# EAGLE board LilyPixel Panel v10 (EAGLE 6.4)
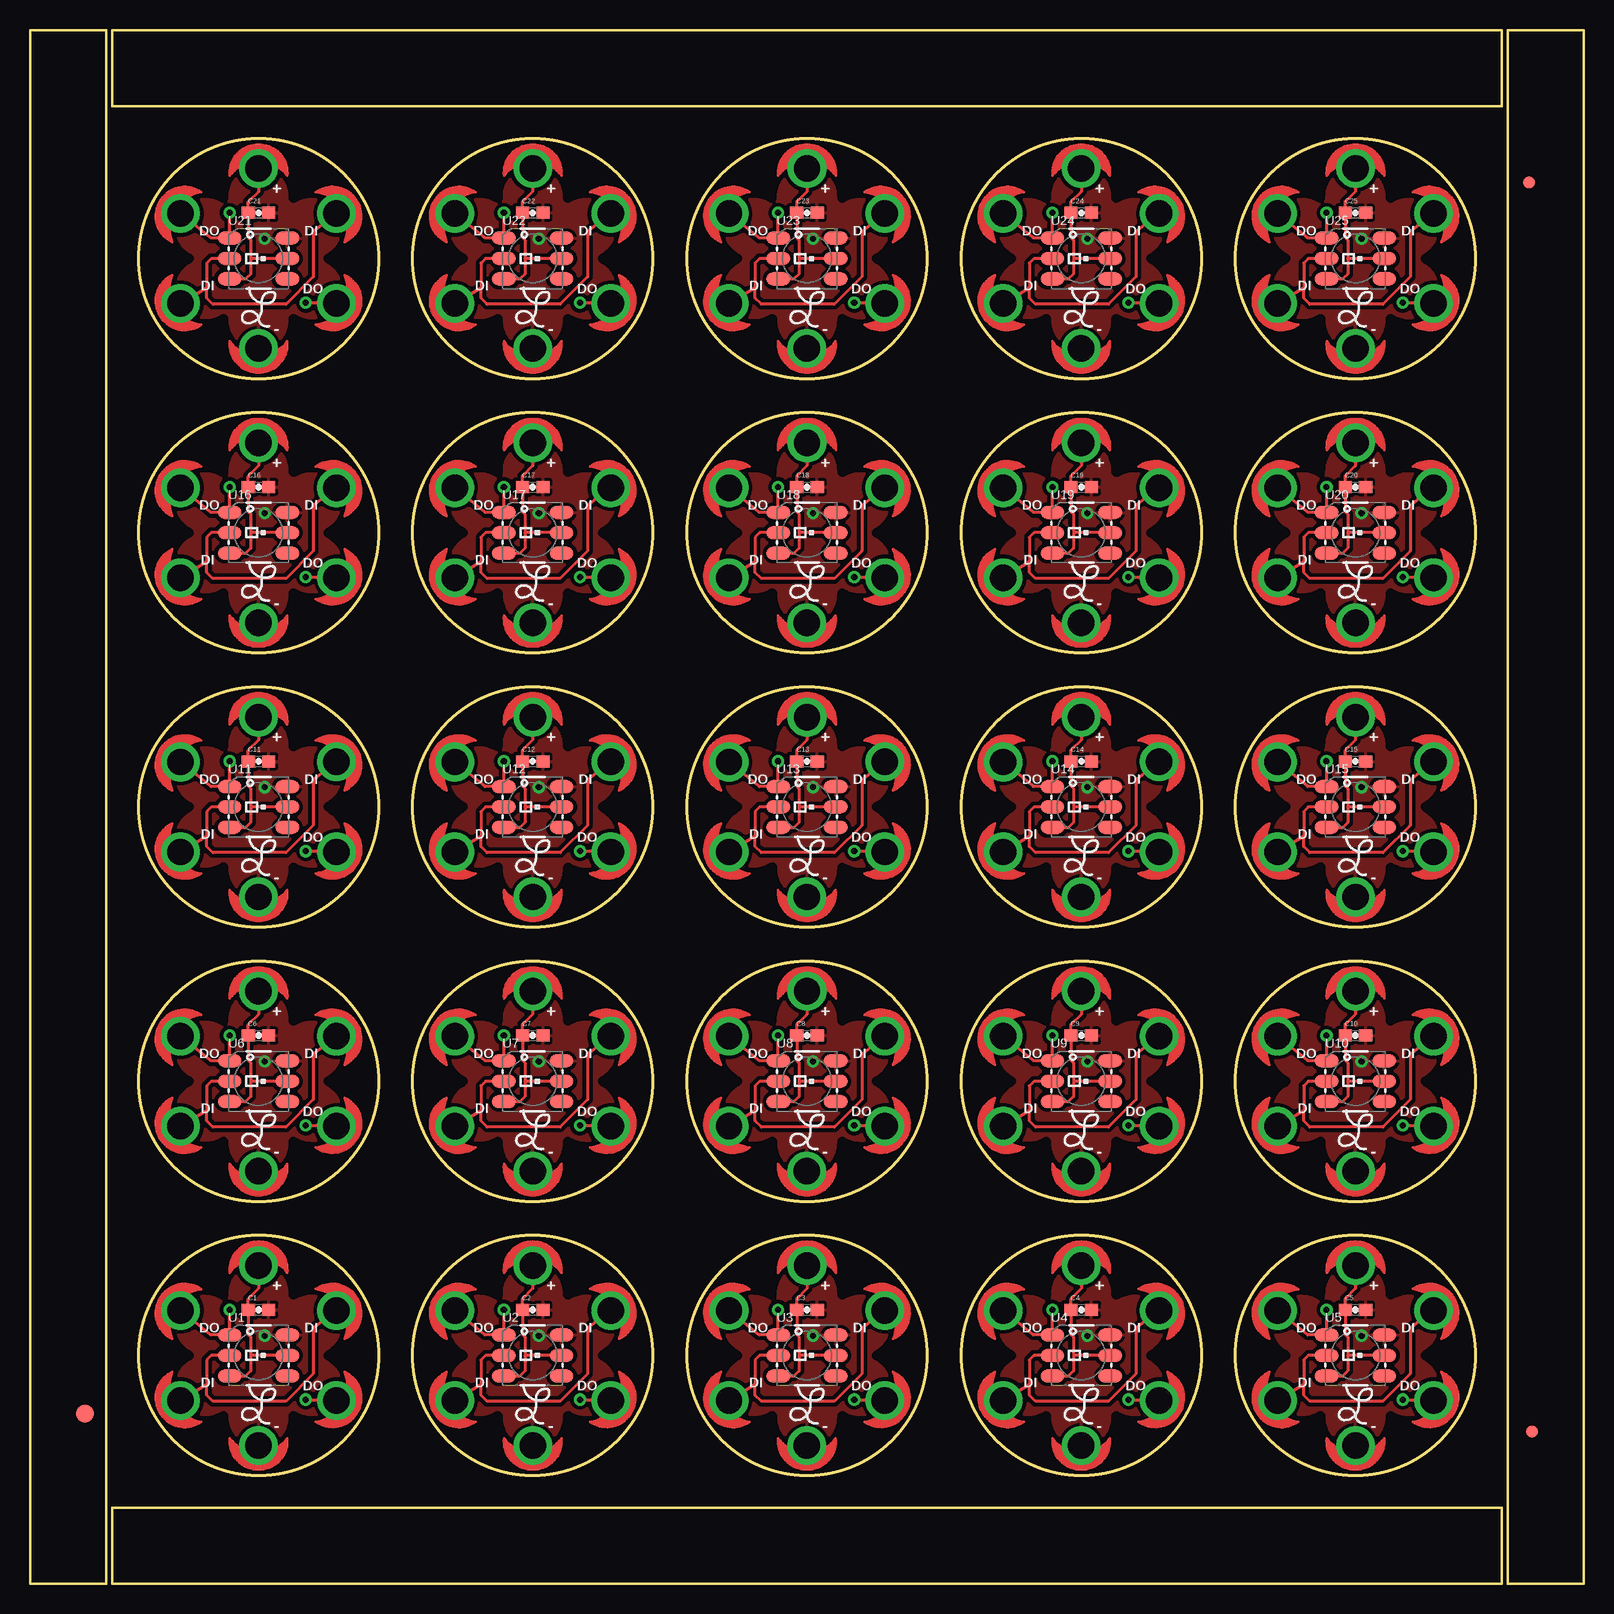
[diagram p0: board, top side]
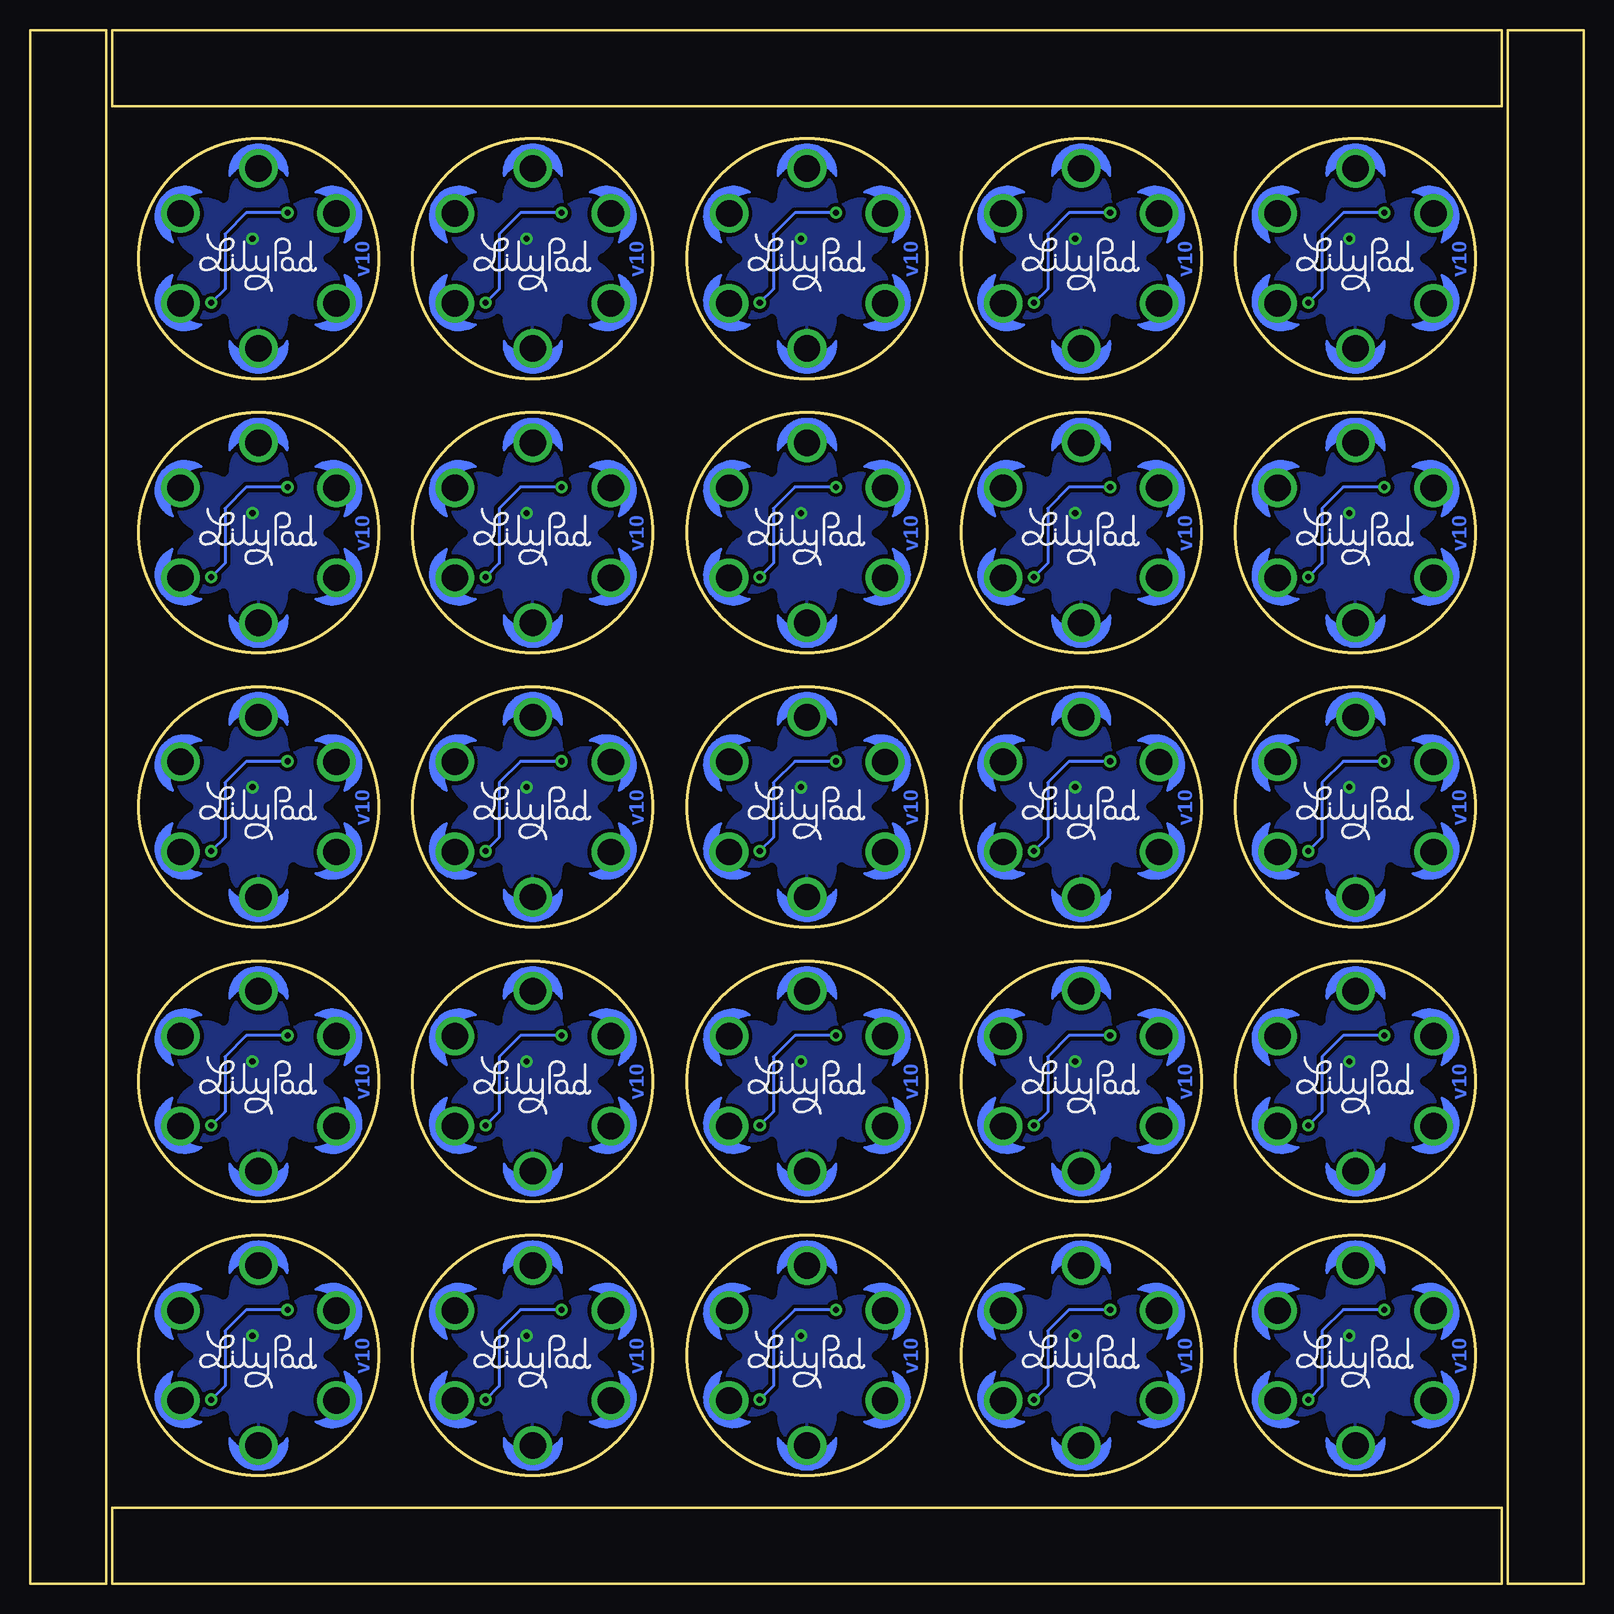
[diagram p1: board, bottom side, seen from below]

Size 129.54 x 129.54 mm. Coordinates in mm from the lower left corner, seen from the top.
Outline: 0,129.54 0,0 6.35,0 6.35,129.54 0,129.54
Outline: 6.86,123.19 122.68,123.19 122.68,129.54 6.86,129.54 6.86,123.19
Outline: 123.19,129.54 123.19,0 129.54,0 129.54,129.54 123.19,129.54
Outline: 122.68,6.35 6.86,6.35 6.86,0 122.68,0 122.68,6.35
Outline: circle at 19.05,19.05 radius 10
Outline: circle at 41.91,19.05 radius 10
Outline: circle at 64.77,19.05 radius 10
Outline: circle at 87.63,19.05 radius 10
Outline: circle at 110.49,19.05 radius 10
Outline: circle at 19.05,41.91 radius 10
Outline: circle at 41.91,41.91 radius 10
Outline: circle at 64.77,41.91 radius 10
Outline: circle at 87.63,41.91 radius 10
Outline: circle at 110.49,41.91 radius 10
Outline: circle at 19.05,64.77 radius 10
Outline: circle at 41.91,64.77 radius 10
Outline: circle at 64.77,64.77 radius 10
Outline: circle at 87.63,64.77 radius 10
Outline: circle at 110.49,64.77 radius 10
Outline: circle at 19.05,87.63 radius 10
Outline: circle at 41.91,87.63 radius 10
Outline: circle at 64.77,87.63 radius 10
Outline: circle at 87.63,87.63 radius 10
Outline: circle at 110.49,87.63 radius 10
Copper layers (1*16): Top 0.035mm / dielectric 1.5mm / Bottom 0.035mm
Design rules "Sparkfun": minimum track width 8mil, minimum drill 20mil, track to track 8mil, track to pad 8mil, pad to pad 8mil, via to via 8mil, smd to smd 8mil, copper to edge 8mil, drill to drill 8mil, minimum pad ring 12mil, minimum via ring 10mil, stop-mask expansion 4mil, vias tented up to drill 20mil, thermal gap 10mil
tRestrict: area 8.9,19.1 to 19.1,29; area 19.1,19.1 to 29.2,29; area 19.1,8.9 to 29.2,19.1; area 8.9,8.9 to 19.1,19.1; area 31.8,19.1 to 41.9,29; area 41.9,19.1 to 52,29; area 41.9,8.9 to 52,19.1; area 31.8,8.9 to 41.9,19.1; area 54.7,19.1 to 64.8,29; area 64.8,19.1 to 74.9,29; area 64.8,8.9 to 74.9,19.1; area 54.7,8.9 to 64.8,19.1; 88 more areas; 150 lines
bRestrict: area 8.9,19.1 to 19.1,29; area 19.1,19.1 to 29.2,29; area 19.1,8.9 to 29.2,19.1; area 8.9,8.9 to 19.1,19.1; area 31.8,19.1 to 41.9,29; area 41.9,19.1 to 52,29; area 41.9,8.9 to 52,19.1; area 31.8,8.9 to 41.9,19.1; area 54.7,19.1 to 64.8,29; area 64.8,19.1 to 74.9,29; area 64.8,8.9 to 74.9,19.1; area 54.7,8.9 to 64.8,19.1; 88 more areas; 150 lines

## Footprints (pad centres in the part's own frame; a part is rotated, then mirrored left to right if it is on the bottom)
0603-CAP = smd 1.1 x 1: 1 -0.85,0; 2 0.85,0
FIDUCIAL-1.5X3 = smd 1.5 x 1.5: 1 0,0
FIDUCIAL-1X2 = smd 1 x 1: 1 0,0
LED-TRICOLOR-5050-IC = smd 2 x 1.1: 1 -2.4,1.7; 2 -2.4,0; 3 -2.4,-1.7; 4 2.4,-1.7; 5 2.4,0; 6 2.4,1.7
PETAL-SMALL-2SIDE = drill 2.2: 1 0,0

## Placement (x,y rotation side)
C1  0.1uF  [0603-CAP]  19.05,22.86 0 top
C2  0.1uF  [0603-CAP]  41.91,22.86 0 top
C3  0.1uF  [0603-CAP]  64.77,22.86 0 top
C4  0.1uF  [0603-CAP]  87.63,22.86 0 top
C5  0.1uF  [0603-CAP]  110.49,22.86 0 top
C6  0.1uF  [0603-CAP]  19.05,45.72 0 top
C7  0.1uF  [0603-CAP]  41.91,45.72 0 top
C8  0.1uF  [0603-CAP]  64.77,45.72 0 top
C9  0.1uF  [0603-CAP]  87.63,45.72 0 top
C10  0.1uF  [0603-CAP]  110.49,45.72 0 top
C11  0.1uF  [0603-CAP]  19.05,68.58 0 top
C12  0.1uF  [0603-CAP]  41.91,68.58 0 top
C13  0.1uF  [0603-CAP]  64.77,68.58 0 top
C14  0.1uF  [0603-CAP]  87.63,68.58 0 top
C15  0.1uF  [0603-CAP]  110.49,68.58 0 top
C16  0.1uF  [0603-CAP]  19.05,91.44 0 top
C17  0.1uF  [0603-CAP]  41.91,91.44 0 top
C18  0.1uF  [0603-CAP]  64.77,91.44 0 top
C19  0.1uF  [0603-CAP]  87.63,91.44 0 top
C20  0.1uF  [0603-CAP]  110.49,91.44 0 top
C21  0.1uF  [0603-CAP]  19.05,114.3 0 top
C22  0.1uF  [0603-CAP]  41.91,114.3 0 top
C23  0.1uF  [0603-CAP]  64.77,114.3 0 top
C24  0.1uF  [0603-CAP]  87.63,114.3 0 top
C25  0.1uF  [0603-CAP]  110.49,114.3 0 top
E$1  [FIDUCIAL-1.5X3]  4.57,14.22 0 top
E$3  [FIDUCIAL-1X2]  124.97,116.84 180 top
E$6  [FIDUCIAL-1X2]  125.22,12.7 0 top
U1  WS2811  [LED-TRICOLOR-5050-IC]  19.05,19.05 0 top
U2  WS2811  [LED-TRICOLOR-5050-IC]  41.91,19.05 0 top
U3  WS2811  [LED-TRICOLOR-5050-IC]  64.77,19.05 0 top
U4  WS2811  [LED-TRICOLOR-5050-IC]  87.63,19.05 0 top
U5  WS2811  [LED-TRICOLOR-5050-IC]  110.49,19.05 0 top
U6  WS2811  [LED-TRICOLOR-5050-IC]  19.05,41.91 0 top
U7  WS2811  [LED-TRICOLOR-5050-IC]  41.91,41.91 0 top
U8  WS2811  [LED-TRICOLOR-5050-IC]  64.77,41.91 0 top
U9  WS2811  [LED-TRICOLOR-5050-IC]  87.63,41.91 0 top
U10  WS2811  [LED-TRICOLOR-5050-IC]  110.49,41.91 0 top
U11  WS2811  [LED-TRICOLOR-5050-IC]  19.05,64.77 0 top
U12  WS2811  [LED-TRICOLOR-5050-IC]  41.91,64.77 0 top
U13  WS2811  [LED-TRICOLOR-5050-IC]  64.77,64.77 0 top
U14  WS2811  [LED-TRICOLOR-5050-IC]  87.63,64.77 0 top
U15  WS2811  [LED-TRICOLOR-5050-IC]  110.49,64.77 0 top
U16  WS2811  [LED-TRICOLOR-5050-IC]  19.05,87.63 0 top
U17  WS2811  [LED-TRICOLOR-5050-IC]  41.91,87.63 0 top
U18  WS2811  [LED-TRICOLOR-5050-IC]  64.77,87.63 0 top
U19  WS2811  [LED-TRICOLOR-5050-IC]  87.63,87.63 0 top
U20  WS2811  [LED-TRICOLOR-5050-IC]  110.49,87.63 0 top
U21  WS2811  [LED-TRICOLOR-5050-IC]  19.05,110.49 0 top
U22  WS2811  [LED-TRICOLOR-5050-IC]  41.91,110.49 0 top
U23  WS2811  [LED-TRICOLOR-5050-IC]  64.77,110.49 0 top
U24  WS2811  [LED-TRICOLOR-5050-IC]  87.63,110.49 0 top
U25  WS2811  [LED-TRICOLOR-5050-IC]  110.49,110.49 0 top
U$1  LOGO-LPLP  [LOGO-LILYPAD]  19.05,19.05 0 bottom
U$2  SEWTAP6  [PETAL-SMALL-2SIDE]  12.55,15.3 300 top
U$3  SEWTAP6  [PETAL-SMALL-2SIDE]  25.55,15.3 60 top
U$4  SEWTAP6  [PETAL-SMALL-2SIDE]  25.54,22.8 120 top
U$5  SEWTAP6  [PETAL-SMALL-2SIDE]  12.55,22.8 240 top
U$6  SEWTAP6  [PETAL-SMALL-2SIDE]  19.05,26.54 180 top
U$7  SEWTAP6  [PETAL-SMALL-2SIDE]  19.05,11.55 0 top
U$8  LOGO-LPL  [LOGO-L]  19.05,14.99 0 top
U$9  SEWTAP6  [PETAL-SMALL-2SIDE]  35.41,15.3 300 top
U$10  SEWTAP6  [PETAL-SMALL-2SIDE]  48.41,15.3 60 top
U$11  SEWTAP6  [PETAL-SMALL-2SIDE]  48.4,22.8 120 top
U$12  SEWTAP6  [PETAL-SMALL-2SIDE]  35.41,22.8 240 top
U$13  SEWTAP6  [PETAL-SMALL-2SIDE]  41.91,26.54 180 top
U$14  SEWTAP6  [PETAL-SMALL-2SIDE]  41.91,11.55 0 top
U$15  LOGO-LPL  [LOGO-L]  41.91,14.99 0 top
U$16  LOGO-LPLP  [LOGO-LILYPAD]  41.91,19.05 0 bottom
U$17  SEWTAP6  [PETAL-SMALL-2SIDE]  58.27,15.3 300 top
U$18  SEWTAP6  [PETAL-SMALL-2SIDE]  71.27,15.3 60 top
U$19  SEWTAP6  [PETAL-SMALL-2SIDE]  71.26,22.8 120 top
U$20  SEWTAP6  [PETAL-SMALL-2SIDE]  58.27,22.8 240 top
U$21  SEWTAP6  [PETAL-SMALL-2SIDE]  64.77,26.54 180 top
U$22  SEWTAP6  [PETAL-SMALL-2SIDE]  64.77,11.55 0 top
U$23  LOGO-LPL  [LOGO-L]  64.77,14.99 0 top
U$24  LOGO-LPLP  [LOGO-LILYPAD]  64.77,19.05 0 bottom
U$25  SEWTAP6  [PETAL-SMALL-2SIDE]  81.13,15.3 300 top
U$26  SEWTAP6  [PETAL-SMALL-2SIDE]  94.13,15.3 60 top
U$27  SEWTAP6  [PETAL-SMALL-2SIDE]  94.12,22.8 120 top
U$28  SEWTAP6  [PETAL-SMALL-2SIDE]  81.13,22.8 240 top
U$29  SEWTAP6  [PETAL-SMALL-2SIDE]  87.63,26.54 180 top
U$30  SEWTAP6  [PETAL-SMALL-2SIDE]  87.63,11.55 0 top
U$31  LOGO-LPL  [LOGO-L]  87.63,14.99 0 top
U$32  LOGO-LPLP  [LOGO-LILYPAD]  87.63,19.05 0 bottom
U$33  SEWTAP6  [PETAL-SMALL-2SIDE]  103.99,15.3 300 top
U$34  SEWTAP6  [PETAL-SMALL-2SIDE]  116.99,15.3 60 top
U$35  SEWTAP6  [PETAL-SMALL-2SIDE]  116.98,22.8 120 top
U$36  SEWTAP6  [PETAL-SMALL-2SIDE]  103.99,22.8 240 top
U$37  SEWTAP6  [PETAL-SMALL-2SIDE]  110.49,26.54 180 top
U$38  SEWTAP6  [PETAL-SMALL-2SIDE]  110.49,11.55 0 top
U$39  LOGO-LPL  [LOGO-L]  110.49,14.99 0 top
U$40  LOGO-LPLP  [LOGO-LILYPAD]  110.49,19.05 0 bottom
U$41  SEWTAP6  [PETAL-SMALL-2SIDE]  12.55,38.16 300 top
U$42  SEWTAP6  [PETAL-SMALL-2SIDE]  25.55,38.16 60 top
U$43  SEWTAP6  [PETAL-SMALL-2SIDE]  25.54,45.66 120 top
U$44  SEWTAP6  [PETAL-SMALL-2SIDE]  12.55,45.66 240 top
U$45  SEWTAP6  [PETAL-SMALL-2SIDE]  19.05,49.4 180 top
U$46  SEWTAP6  [PETAL-SMALL-2SIDE]  19.05,34.41 0 top
U$47  LOGO-LPL  [LOGO-L]  19.05,37.85 0 top
U$48  LOGO-LPLP  [LOGO-LILYPAD]  19.05,41.91 0 bottom
U$49  SEWTAP6  [PETAL-SMALL-2SIDE]  35.41,38.16 300 top
U$50  SEWTAP6  [PETAL-SMALL-2SIDE]  48.41,38.16 60 top
U$51  SEWTAP6  [PETAL-SMALL-2SIDE]  48.4,45.66 120 top
U$52  SEWTAP6  [PETAL-SMALL-2SIDE]  35.41,45.66 240 top
U$53  SEWTAP6  [PETAL-SMALL-2SIDE]  41.91,49.4 180 top
U$54  SEWTAP6  [PETAL-SMALL-2SIDE]  41.91,34.41 0 top
U$55  LOGO-LPL  [LOGO-L]  41.91,37.85 0 top
U$56  LOGO-LPLP  [LOGO-LILYPAD]  41.91,41.91 0 bottom
U$57  SEWTAP6  [PETAL-SMALL-2SIDE]  58.27,38.16 300 top
U$58  SEWTAP6  [PETAL-SMALL-2SIDE]  71.27,38.16 60 top
U$59  SEWTAP6  [PETAL-SMALL-2SIDE]  71.26,45.66 120 top
U$60  SEWTAP6  [PETAL-SMALL-2SIDE]  58.27,45.66 240 top
U$61  SEWTAP6  [PETAL-SMALL-2SIDE]  64.77,49.4 180 top
U$62  SEWTAP6  [PETAL-SMALL-2SIDE]  64.77,34.41 0 top
U$63  LOGO-LPL  [LOGO-L]  64.77,37.85 0 top
U$64  LOGO-LPLP  [LOGO-LILYPAD]  64.77,41.91 0 bottom
U$65  SEWTAP6  [PETAL-SMALL-2SIDE]  81.13,38.16 300 top
U$66  SEWTAP6  [PETAL-SMALL-2SIDE]  94.13,38.16 60 top
U$67  SEWTAP6  [PETAL-SMALL-2SIDE]  94.12,45.66 120 top
U$68  SEWTAP6  [PETAL-SMALL-2SIDE]  81.13,45.66 240 top
U$69  SEWTAP6  [PETAL-SMALL-2SIDE]  87.63,49.4 180 top
U$70  SEWTAP6  [PETAL-SMALL-2SIDE]  87.63,34.41 0 top
U$71  LOGO-LPL  [LOGO-L]  87.63,37.85 0 top
U$72  LOGO-LPLP  [LOGO-LILYPAD]  87.63,41.91 0 bottom
U$73  SEWTAP6  [PETAL-SMALL-2SIDE]  103.99,38.16 300 top
U$74  SEWTAP6  [PETAL-SMALL-2SIDE]  116.99,38.16 60 top
U$75  SEWTAP6  [PETAL-SMALL-2SIDE]  116.98,45.66 120 top
U$76  SEWTAP6  [PETAL-SMALL-2SIDE]  103.99,45.66 240 top
U$77  SEWTAP6  [PETAL-SMALL-2SIDE]  110.49,49.4 180 top
U$78  SEWTAP6  [PETAL-SMALL-2SIDE]  110.49,34.41 0 top
U$79  LOGO-LPL  [LOGO-L]  110.49,37.85 0 top
U$80  LOGO-LPLP  [LOGO-LILYPAD]  110.49,41.91 0 bottom
U$81  SEWTAP6  [PETAL-SMALL-2SIDE]  12.55,61.02 300 top
U$82  SEWTAP6  [PETAL-SMALL-2SIDE]  25.55,61.02 60 top
U$83  SEWTAP6  [PETAL-SMALL-2SIDE]  25.54,68.52 120 top
U$84  SEWTAP6  [PETAL-SMALL-2SIDE]  12.55,68.52 240 top
U$85  SEWTAP6  [PETAL-SMALL-2SIDE]  19.05,72.26 180 top
U$86  SEWTAP6  [PETAL-SMALL-2SIDE]  19.05,57.27 0 top
U$87  LOGO-LPL  [LOGO-L]  19.05,60.71 0 top
U$88  LOGO-LPLP  [LOGO-LILYPAD]  19.05,64.77 0 bottom
U$89  SEWTAP6  [PETAL-SMALL-2SIDE]  35.41,61.02 300 top
U$90  SEWTAP6  [PETAL-SMALL-2SIDE]  48.41,61.02 60 top
U$91  SEWTAP6  [PETAL-SMALL-2SIDE]  48.4,68.52 120 top
U$92  SEWTAP6  [PETAL-SMALL-2SIDE]  35.41,68.52 240 top
U$93  SEWTAP6  [PETAL-SMALL-2SIDE]  41.91,72.26 180 top
U$94  SEWTAP6  [PETAL-SMALL-2SIDE]  41.91,57.27 0 top
U$95  LOGO-LPL  [LOGO-L]  41.91,60.71 0 top
U$96  LOGO-LPLP  [LOGO-LILYPAD]  41.91,64.77 0 bottom
U$97  SEWTAP6  [PETAL-SMALL-2SIDE]  58.27,61.02 300 top
U$98  SEWTAP6  [PETAL-SMALL-2SIDE]  71.27,61.02 60 top
U$99  SEWTAP6  [PETAL-SMALL-2SIDE]  71.26,68.52 120 top
U$100  SEWTAP6  [PETAL-SMALL-2SIDE]  58.27,68.52 240 top
U$101  SEWTAP6  [PETAL-SMALL-2SIDE]  64.77,72.26 180 top
U$102  SEWTAP6  [PETAL-SMALL-2SIDE]  64.77,57.27 0 top
U$103  LOGO-LPL  [LOGO-L]  64.77,60.71 0 top
U$104  LOGO-LPLP  [LOGO-LILYPAD]  64.77,64.77 0 bottom
U$105  SEWTAP6  [PETAL-SMALL-2SIDE]  81.13,61.02 300 top
U$106  SEWTAP6  [PETAL-SMALL-2SIDE]  94.13,61.02 60 top
U$107  SEWTAP6  [PETAL-SMALL-2SIDE]  94.12,68.52 120 top
U$108  SEWTAP6  [PETAL-SMALL-2SIDE]  81.13,68.52 240 top
U$109  SEWTAP6  [PETAL-SMALL-2SIDE]  87.63,72.26 180 top
U$110  SEWTAP6  [PETAL-SMALL-2SIDE]  87.63,57.27 0 top
U$111  LOGO-LPL  [LOGO-L]  87.63,60.71 0 top
U$112  LOGO-LPLP  [LOGO-LILYPAD]  87.63,64.77 0 bottom
U$113  SEWTAP6  [PETAL-SMALL-2SIDE]  103.99,61.02 300 top
U$114  SEWTAP6  [PETAL-SMALL-2SIDE]  116.99,61.02 60 top
U$115  SEWTAP6  [PETAL-SMALL-2SIDE]  116.98,68.52 120 top
U$116  SEWTAP6  [PETAL-SMALL-2SIDE]  103.99,68.52 240 top
U$117  SEWTAP6  [PETAL-SMALL-2SIDE]  110.49,72.26 180 top
U$118  SEWTAP6  [PETAL-SMALL-2SIDE]  110.49,57.27 0 top
U$119  LOGO-LPL  [LOGO-L]  110.49,60.71 0 top
U$120  LOGO-LPLP  [LOGO-LILYPAD]  110.49,64.77 0 bottom
U$121  SEWTAP6  [PETAL-SMALL-2SIDE]  12.55,83.88 300 top
U$122  SEWTAP6  [PETAL-SMALL-2SIDE]  25.55,83.88 60 top
U$123  SEWTAP6  [PETAL-SMALL-2SIDE]  25.54,91.38 120 top
U$124  SEWTAP6  [PETAL-SMALL-2SIDE]  12.55,91.38 240 top
U$125  SEWTAP6  [PETAL-SMALL-2SIDE]  19.05,95.12 180 top
U$126  SEWTAP6  [PETAL-SMALL-2SIDE]  19.05,80.13 0 top
U$127  LOGO-LPL  [LOGO-L]  19.05,83.57 0 top
U$128  LOGO-LPLP  [LOGO-LILYPAD]  19.05,87.63 0 bottom
U$129  SEWTAP6  [PETAL-SMALL-2SIDE]  35.41,83.88 300 top
U$130  SEWTAP6  [PETAL-SMALL-2SIDE]  48.41,83.88 60 top
U$131  SEWTAP6  [PETAL-SMALL-2SIDE]  48.4,91.38 120 top
U$132  SEWTAP6  [PETAL-SMALL-2SIDE]  35.41,91.38 240 top
U$133  SEWTAP6  [PETAL-SMALL-2SIDE]  41.91,95.12 180 top
U$134  SEWTAP6  [PETAL-SMALL-2SIDE]  41.91,80.13 0 top
U$135  LOGO-LPL  [LOGO-L]  41.91,83.57 0 top
U$136  LOGO-LPLP  [LOGO-LILYPAD]  41.91,87.63 0 bottom
U$137  SEWTAP6  [PETAL-SMALL-2SIDE]  58.27,83.88 300 top
U$138  SEWTAP6  [PETAL-SMALL-2SIDE]  71.27,83.88 60 top
U$139  SEWTAP6  [PETAL-SMALL-2SIDE]  71.26,91.38 120 top
U$140  SEWTAP6  [PETAL-SMALL-2SIDE]  58.27,91.38 240 top
U$141  SEWTAP6  [PETAL-SMALL-2SIDE]  64.77,95.12 180 top
U$142  SEWTAP6  [PETAL-SMALL-2SIDE]  64.77,80.13 0 top
U$143  LOGO-LPL  [LOGO-L]  64.77,83.57 0 top
U$144  LOGO-LPLP  [LOGO-LILYPAD]  64.77,87.63 0 bottom
U$145  SEWTAP6  [PETAL-SMALL-2SIDE]  81.13,83.88 300 top
U$146  SEWTAP6  [PETAL-SMALL-2SIDE]  94.13,83.88 60 top
U$147  SEWTAP6  [PETAL-SMALL-2SIDE]  94.12,91.38 120 top
U$148  SEWTAP6  [PETAL-SMALL-2SIDE]  81.13,91.38 240 top
U$149  SEWTAP6  [PETAL-SMALL-2SIDE]  87.63,95.12 180 top
U$150  SEWTAP6  [PETAL-SMALL-2SIDE]  87.63,80.13 0 top
U$151  LOGO-LPL  [LOGO-L]  87.63,83.57 0 top
U$152  LOGO-LPLP  [LOGO-LILYPAD]  87.63,87.63 0 bottom
U$153  SEWTAP6  [PETAL-SMALL-2SIDE]  103.99,83.88 300 top
U$154  SEWTAP6  [PETAL-SMALL-2SIDE]  116.99,83.88 60 top
U$155  SEWTAP6  [PETAL-SMALL-2SIDE]  116.98,91.38 120 top
U$156  SEWTAP6  [PETAL-SMALL-2SIDE]  103.99,91.38 240 top
U$157  SEWTAP6  [PETAL-SMALL-2SIDE]  110.49,95.12 180 top
U$158  SEWTAP6  [PETAL-SMALL-2SIDE]  110.49,80.13 0 top
U$159  LOGO-LPL  [LOGO-L]  110.49,83.57 0 top
U$160  LOGO-LPLP  [LOGO-LILYPAD]  110.49,87.63 0 bottom
U$161  SEWTAP6  [PETAL-SMALL-2SIDE]  12.55,106.74 300 top
U$162  SEWTAP6  [PETAL-SMALL-2SIDE]  25.55,106.74 60 top
U$163  SEWTAP6  [PETAL-SMALL-2SIDE]  25.54,114.24 120 top
U$164  SEWTAP6  [PETAL-SMALL-2SIDE]  12.55,114.24 240 top
U$165  SEWTAP6  [PETAL-SMALL-2SIDE]  19.05,117.98 180 top
U$166  SEWTAP6  [PETAL-SMALL-2SIDE]  19.05,102.99 0 top
U$167  LOGO-LPL  [LOGO-L]  19.05,106.43 0 top
U$168  LOGO-LPLP  [LOGO-LILYPAD]  19.05,110.49 0 bottom
U$169  SEWTAP6  [PETAL-SMALL-2SIDE]  35.41,106.74 300 top
U$170  SEWTAP6  [PETAL-SMALL-2SIDE]  48.41,106.74 60 top
U$171  SEWTAP6  [PETAL-SMALL-2SIDE]  48.4,114.24 120 top
U$172  SEWTAP6  [PETAL-SMALL-2SIDE]  35.41,114.24 240 top
U$173  SEWTAP6  [PETAL-SMALL-2SIDE]  41.91,117.98 180 top
U$174  SEWTAP6  [PETAL-SMALL-2SIDE]  41.91,102.99 0 top
U$175  LOGO-LPL  [LOGO-L]  41.91,106.43 0 top
U$176  LOGO-LPLP  [LOGO-LILYPAD]  41.91,110.49 0 bottom
U$177  SEWTAP6  [PETAL-SMALL-2SIDE]  58.27,106.74 300 top
U$178  SEWTAP6  [PETAL-SMALL-2SIDE]  71.27,106.74 60 top
U$179  SEWTAP6  [PETAL-SMALL-2SIDE]  71.26,114.24 120 top
U$180  SEWTAP6  [PETAL-SMALL-2SIDE]  58.27,114.24 240 top
U$181  SEWTAP6  [PETAL-SMALL-2SIDE]  64.77,117.98 180 top
U$182  SEWTAP6  [PETAL-SMALL-2SIDE]  64.77,102.99 0 top
U$183  LOGO-LPL  [LOGO-L]  64.77,106.43 0 top
U$184  LOGO-LPLP  [LOGO-LILYPAD]  64.77,110.49 0 bottom
U$185  SEWTAP6  [PETAL-SMALL-2SIDE]  81.13,106.74 300 top
U$186  SEWTAP6  [PETAL-SMALL-2SIDE]  94.13,106.74 60 top
U$187  SEWTAP6  [PETAL-SMALL-2SIDE]  94.12,114.24 120 top
U$188  SEWTAP6  [PETAL-SMALL-2SIDE]  81.13,114.24 240 top
U$189  SEWTAP6  [PETAL-SMALL-2SIDE]  87.63,117.98 180 top
U$190  SEWTAP6  [PETAL-SMALL-2SIDE]  87.63,102.99 0 top
U$191  LOGO-LPL  [LOGO-L]  87.63,106.43 0 top
U$192  LOGO-LPLP  [LOGO-LILYPAD]  87.63,110.49 0 bottom
U$193  SEWTAP6  [PETAL-SMALL-2SIDE]  103.99,106.74 300 top
U$194  SEWTAP6  [PETAL-SMALL-2SIDE]  116.99,106.74 60 top
U$195  SEWTAP6  [PETAL-SMALL-2SIDE]  116.98,114.24 120 top
U$196  SEWTAP6  [PETAL-SMALL-2SIDE]  103.99,114.24 240 top
U$197  SEWTAP6  [PETAL-SMALL-2SIDE]  110.49,117.98 180 top
U$198  SEWTAP6  [PETAL-SMALL-2SIDE]  110.49,102.99 0 top
U$199  LOGO-LPL  [LOGO-L]  110.49,106.43 0 top
U$200  LOGO-LPLP  [LOGO-LILYPAD]  110.49,110.49 0 bottom

## Library data of the parts
C1-C25 = SparkFun-Capacitors; PROD_ID: CAP-00810
E$1 E$3 E$6 = SparkFun-Aesthetics
U1-U25 = SparkFun-LED; PROD_ID: DIO-11598
U$1-U$200 = LilyPad-Wearables

## Nets
DI: U1.2 U$2.1 U$4.1
DI1: U2.2 U$9.1 U$11.1
DI2: U3.2 U$17.1 U$19.1
DI3: U4.2 U$25.1 U$27.1
DI4: U5.2 U$33.1 U$35.1
DI5: U6.2 U$41.1 U$43.1
DI6: U7.2 U$49.1 U$51.1
DI7: U8.2 U$57.1 U$59.1
DI8: U9.2 U$65.1 U$67.1
DI9: U10.2 U$73.1 U$75.1
DI10: U11.2 U$81.1 U$83.1
DI11: U12.2 U$89.1 U$91.1
DI12: U13.2 U$97.1 U$99.1
DI13: U14.2 U$105.1 U$107.1
DI14: U15.2 U$113.1 U$115.1
DI15: U16.2 U$121.1 U$123.1
DI16: U17.2 U$129.1 U$131.1
DI17: U18.2 U$137.1 U$139.1
DI18: U19.2 U$145.1 U$147.1
DI19: U20.2 U$153.1 U$155.1
DI20: U21.2 U$161.1 U$163.1
DI21: U22.2 U$169.1 U$171.1
DI22: U23.2 U$177.1 U$179.1
DI23: U24.2 U$185.1 U$187.1
DI24: U25.2 U$193.1 U$195.1
DO: U1.1 U$3.1 U$5.1
DO1: U2.1 U$10.1 U$12.1
DO2: U3.1 U$18.1 U$20.1
DO3: U4.1 U$26.1 U$28.1
DO4: U5.1 U$34.1 U$36.1
DO5: U6.1 U$42.1 U$44.1
DO6: U7.1 U$50.1 U$52.1
DO7: U8.1 U$58.1 U$60.1
DO8: U9.1 U$66.1 U$68.1
DO9: U10.1 U$74.1 U$76.1
DO10: U11.1 U$82.1 U$84.1
DO11: U12.1 U$90.1 U$92.1
DO12: U13.1 U$98.1 U$100.1
DO13: U14.1 U$106.1 U$108.1
DO14: U15.1 U$114.1 U$116.1
DO15: U16.1 U$122.1 U$124.1
DO16: U17.1 U$130.1 U$132.1
DO17: U18.1 U$138.1 U$140.1
DO18: U19.1 U$146.1 U$148.1
DO19: U20.1 U$154.1 U$156.1
DO20: U21.1 U$162.1 U$164.1
DO21: U22.1 U$170.1 U$172.1
DO22: U23.1 U$178.1 U$180.1
DO23: U24.1 U$186.1 U$188.1
DO24: U25.1 U$194.1 U$196.1
GND: C1.2 U1.6 U$7.1
GND1: C2.2 U2.6 U$14.1
GND2: C3.2 U3.6 U$22.1
GND3: C4.2 U4.6 U$30.1
GND4: C5.2 U5.6 U$38.1
GND5: C6.2 U6.6 U$46.1
GND6: C7.2 U7.6 U$54.1
GND7: C8.2 U8.6 U$62.1
GND8: C9.2 U9.6 U$70.1
GND9: C10.2 U10.6 U$78.1
GND10: C11.2 U11.6 U$86.1
GND11: C12.2 U12.6 U$94.1
GND12: C13.2 U13.6 U$102.1
GND13: C14.2 U14.6 U$110.1
GND14: C15.2 U15.6 U$118.1
GND15: C16.2 U16.6 U$126.1
GND16: C17.2 U17.6 U$134.1
GND17: C18.2 U18.6 U$142.1
GND18: C19.2 U19.6 U$150.1
GND19: C20.2 U20.6 U$158.1
GND20: C21.2 U21.6 U$166.1
GND21: C22.2 U22.6 U$174.1
GND22: C23.2 U23.6 U$182.1
GND23: C24.2 U24.6 U$190.1
GND24: C25.2 U25.6 U$198.1
VCC: C1.1 U1.3 U1.5 U$6.1
VCC1: C2.1 U2.3 U2.5 U$13.1
VCC2: C3.1 U3.3 U3.5 U$21.1
VCC3: C4.1 U4.3 U4.5 U$29.1
VCC4: C5.1 U5.3 U5.5 U$37.1
VCC5: C6.1 U6.3 U6.5 U$45.1
VCC6: C7.1 U7.3 U7.5 U$53.1
VCC7: C8.1 U8.3 U8.5 U$61.1
VCC8: C9.1 U9.3 U9.5 U$69.1
VCC9: C10.1 U10.3 U10.5 U$77.1
VCC10: C11.1 U11.3 U11.5 U$85.1
VCC11: C12.1 U12.3 U12.5 U$93.1
VCC12: C13.1 U13.3 U13.5 U$101.1
VCC13: C14.1 U14.3 U14.5 U$109.1
VCC14: C15.1 U15.3 U15.5 U$117.1
VCC15: C16.1 U16.3 U16.5 U$125.1
VCC16: C17.1 U17.3 U17.5 U$133.1
VCC17: C18.1 U18.3 U18.5 U$141.1
VCC18: C19.1 U19.3 U19.5 U$149.1
VCC19: C20.1 U20.3 U20.5 U$157.1
VCC20: C21.1 U21.3 U21.5 U$165.1
VCC21: C22.1 U22.3 U22.5 U$173.1
VCC22: C23.1 U23.3 U23.5 U$181.1
VCC23: C24.1 U24.3 U24.5 U$189.1
VCC24: C25.1 U25.3 U25.5 U$197.1

## Tracks (layer width: path | path; a pad name or v marks a point on that pad's centre or on a via)
DI
  Top 0.254: U$2.1 14.73,16.64 | U1.2 15.11,19.05 14.73,18.67 14.73,16.64 | U$4.1 23.62,21.34 23.62,17.53 21.34,15.24 15.24,15.24 14.73,15.75 14.73,16.64
DI1
  Top 0.254: U$9.1 37.59,16.64 | U2.2 37.97,19.05 37.59,18.67 37.59,16.64 | U$11.1 46.48,21.34 46.48,17.53 44.2,15.24 38.1,15.24 37.59,15.75 37.59,16.64
DI2
  Top 0.254: U$17.1 60.45,16.64 | U3.2 60.83,19.05 60.45,18.67 60.45,16.64 | U$19.1 69.34,21.34 69.34,17.53 67.06,15.24 60.96,15.24 60.45,15.75 60.45,16.64
DI3
  Top 0.254: U$25.1 83.31,16.64 | U4.2 83.69,19.05 83.31,18.67 83.31,16.64 | U$27.1 92.2,21.34 92.2,17.53 89.92,15.24 83.82,15.24 83.31,15.75 83.31,16.64
DI4
  Top 0.254: U$33.1 106.17,16.64 | U5.2 106.55,19.05 106.17,18.67 106.17,16.64 | U$35.1 115.06,21.34 115.06,17.53 112.78,15.24 106.68,15.24 106.17,15.75 106.17,16.64
DI5
  Top 0.254: U$41.1 14.73,39.5 | U6.2 15.11,41.91 14.73,41.53 14.73,39.5 | U$43.1 23.62,44.2 23.62,40.39 21.34,38.1 15.24,38.1 14.73,38.61 14.73,39.5
DI6
  Top 0.254: U$49.1 37.59,39.5 | U7.2 37.97,41.91 37.59,41.53 37.59,39.5 | U$51.1 46.48,44.2 46.48,40.39 44.2,38.1 38.1,38.1 37.59,38.61 37.59,39.5
DI7
  Top 0.254: U$57.1 60.45,39.5 | U8.2 60.83,41.91 60.45,41.53 60.45,39.5 | U$59.1 69.34,44.2 69.34,40.39 67.06,38.1 60.96,38.1 60.45,38.61 60.45,39.5
DI8
  Top 0.254: U$65.1 83.31,39.5 | U9.2 83.69,41.91 83.31,41.53 83.31,39.5 | U$67.1 92.2,44.2 92.2,40.39 89.92,38.1 83.82,38.1 83.31,38.61 83.31,39.5
DI9
  Top 0.254: U$73.1 106.17,39.5 | U10.2 106.55,41.91 106.17,41.53 106.17,39.5 | U$75.1 115.06,44.2 115.06,40.39 112.78,38.1 106.68,38.1 106.17,38.61 106.17,39.5
DI10
  Top 0.254: U$81.1 14.73,62.36 | U11.2 15.11,64.77 14.73,64.39 14.73,62.36 | U$83.1 23.62,67.06 23.62,63.25 21.34,60.96 15.24,60.96 14.73,61.47 14.73,62.36
DI11
  Top 0.254: U$89.1 37.59,62.36 | U12.2 37.97,64.77 37.59,64.39 37.59,62.36 | U$91.1 46.48,67.06 46.48,63.25 44.2,60.96 38.1,60.96 37.59,61.47 37.59,62.36
DI12
  Top 0.254: U$97.1 60.45,62.36 | U13.2 60.83,64.77 60.45,64.39 60.45,62.36 | U$99.1 69.34,67.06 69.34,63.25 67.06,60.96 60.96,60.96 60.45,61.47 60.45,62.36
DI13
  Top 0.254: U$105.1 83.31,62.36 | U14.2 83.69,64.77 83.31,64.39 83.31,62.36 | U$107.1 92.2,67.06 92.2,63.25 89.92,60.96 83.82,60.96 83.31,61.47 83.31,62.36
DI14
  Top 0.254: U$113.1 106.17,62.36 | U15.2 106.55,64.77 106.17,64.39 106.17,62.36 | U$115.1 115.06,67.06 115.06,63.25 112.78,60.96 106.68,60.96 106.17,61.47 106.17,62.36
DI15
  Top 0.254: U$121.1 14.73,85.22 | U16.2 15.11,87.63 14.73,87.25 14.73,85.22 | U$123.1 23.62,89.92 23.62,86.11 21.34,83.82 15.24,83.82 14.73,84.33 14.73,85.22
DI16
  Top 0.254: U$129.1 37.59,85.22 | U17.2 37.97,87.63 37.59,87.25 37.59,85.22 | U$131.1 46.48,89.92 46.48,86.11 44.2,83.82 38.1,83.82 37.59,84.33 37.59,85.22
DI17
  Top 0.254: U$137.1 60.45,85.22 | U18.2 60.83,87.63 60.45,87.25 60.45,85.22 | U$139.1 69.34,89.92 69.34,86.11 67.06,83.82 60.96,83.82 60.45,84.33 60.45,85.22
DI18
  Top 0.254: U$145.1 83.31,85.22 | U19.2 83.69,87.63 83.31,87.25 83.31,85.22 | U$147.1 92.2,89.92 92.2,86.11 89.92,83.82 83.82,83.82 83.31,84.33 83.31,85.22
DI19
  Top 0.254: U$153.1 106.17,85.22 | U20.2 106.55,87.63 106.17,87.25 106.17,85.22 | U$155.1 115.06,89.92 115.06,86.11 112.78,83.82 106.68,83.82 106.17,84.33 106.17,85.22
DI20
  Top 0.254: U$161.1 14.73,108.08 | U21.2 15.11,110.49 14.73,110.11 14.73,108.08 | U$163.1 23.62,112.78 23.62,108.97 21.34,106.68 15.24,106.68 14.73,107.19 14.73,108.08
DI21
  Top 0.254: U$169.1 37.59,108.08 | U22.2 37.97,110.49 37.59,110.11 37.59,108.08 | U$171.1 46.48,112.78 46.48,108.97 44.2,106.68 38.1,106.68 37.59,107.19 37.59,108.08
DI22
  Top 0.254: U$177.1 60.45,108.08 | U23.2 60.83,110.49 60.45,110.11 60.45,108.08 | U$179.1 69.34,112.78 69.34,108.97 67.06,106.68 60.96,106.68 60.45,107.19 60.45,108.08
DI23
  Top 0.254: U$185.1 83.31,108.08 | U24.2 83.69,110.49 83.31,110.11 83.31,108.08 | U$187.1 92.2,112.78 92.2,108.97 89.92,106.68 83.82,106.68 83.31,107.19 83.31,108.08
DI24
  Top 0.254: U$193.1 106.17,108.08 | U25.2 106.55,110.49 106.17,110.11 106.17,108.08 | U$195.1 115.06,112.78 115.06,108.97 112.78,106.68 106.68,106.68 106.17,107.19 106.17,108.08
DO  (via drill 0.51)
  Top 0.254: U$5.1 14.99,20.83 15.06,20.75 U1.1 16.65,22.85 v16.64,22.86 | v22.99,15.37 25.48,15.37 U$3.1
  Bottom 0.254: v16.64,22.86 20.07,22.86 21.84,21.08 21.84,16.51 v22.99,15.37
DO1  (via drill 0.51)
  Top 0.254: U$12.1 37.85,20.83 37.92,20.75 U2.1 39.51,22.85 v39.5,22.86 | v45.85,15.37 48.34,15.37 U$10.1
  Bottom 0.254: v39.5,22.86 42.93,22.86 44.7,21.08 44.7,16.51 v45.85,15.37
DO2  (via drill 0.51)
  Top 0.254: U$20.1 60.71,20.83 60.78,20.75 U3.1 62.37,22.85 v62.36,22.86 | v68.71,15.37 71.2,15.37 U$18.1
  Bottom 0.254: v62.36,22.86 65.79,22.86 67.56,21.08 67.56,16.51 v68.71,15.37
DO3  (via drill 0.51)
  Top 0.254: U$28.1 83.57,20.83 83.64,20.75 U4.1 85.23,22.85 v85.22,22.86 | v91.57,15.37 94.06,15.37 U$26.1
  Bottom 0.254: v85.22,22.86 88.65,22.86 90.42,21.08 90.42,16.51 v91.57,15.37
DO4  (via drill 0.51)
  Top 0.254: U$36.1 106.43,20.83 106.5,20.75 U5.1 108.09,22.85 v108.08,22.86 | v114.43,15.37 116.92,15.37 U$34.1
  Bottom 0.254: v108.08,22.86 111.51,22.86 113.28,21.08 113.28,16.51 v114.43,15.37
DO5  (via drill 0.51)
  Top 0.254: U$44.1 14.99,43.69 15.06,43.61 U6.1 16.65,45.71 v16.64,45.72 | v22.99,38.23 25.48,38.23 U$42.1
  Bottom 0.254: v16.64,45.72 20.07,45.72 21.84,43.94 21.84,39.37 v22.99,38.23
DO6  (via drill 0.51)
  Top 0.254: U$52.1 37.85,43.69 37.92,43.61 U7.1 39.51,45.71 v39.5,45.72 | v45.85,38.23 48.34,38.23 U$50.1
  Bottom 0.254: v39.5,45.72 42.93,45.72 44.7,43.94 44.7,39.37 v45.85,38.23
DO7  (via drill 0.51)
  Top 0.254: U$60.1 60.71,43.69 60.78,43.61 U8.1 62.37,45.71 v62.36,45.72 | v68.71,38.23 71.2,38.23 U$58.1
  Bottom 0.254: v62.36,45.72 65.79,45.72 67.56,43.94 67.56,39.37 v68.71,38.23
DO8  (via drill 0.51)
  Top 0.254: U$68.1 83.57,43.69 83.64,43.61 U9.1 85.23,45.71 v85.22,45.72 | v91.57,38.23 94.06,38.23 U$66.1
  Bottom 0.254: v85.22,45.72 88.65,45.72 90.42,43.94 90.42,39.37 v91.57,38.23
DO9  (via drill 0.51)
  Top 0.254: U$76.1 106.43,43.69 106.5,43.61 U10.1 108.09,45.71 v108.08,45.72 | v114.43,38.23 116.92,38.23 U$74.1
  Bottom 0.254: v108.08,45.72 111.51,45.72 113.28,43.94 113.28,39.37 v114.43,38.23
DO10  (via drill 0.51)
  Top 0.254: U$84.1 14.99,66.55 15.06,66.47 U11.1 16.65,68.57 v16.64,68.58 | v22.99,61.09 25.48,61.09 U$82.1
  Bottom 0.254: v16.64,68.58 20.07,68.58 21.84,66.8 21.84,62.23 v22.99,61.09
DO11  (via drill 0.51)
  Top 0.254: U$92.1 37.85,66.55 37.92,66.47 U12.1 39.51,68.57 v39.5,68.58 | v45.85,61.09 48.34,61.09 U$90.1
  Bottom 0.254: v39.5,68.58 42.93,68.58 44.7,66.8 44.7,62.23 v45.85,61.09
DO12  (via drill 0.51)
  Top 0.254: U$100.1 60.71,66.55 60.78,66.47 U13.1 62.37,68.57 v62.36,68.58 | v68.71,61.09 71.2,61.09 U$98.1
  Bottom 0.254: v62.36,68.58 65.79,68.58 67.56,66.8 67.56,62.23 v68.71,61.09
DO13  (via drill 0.51)
  Top 0.254: U$108.1 83.57,66.55 83.64,66.47 U14.1 85.23,68.57 v85.22,68.58 | v91.57,61.09 94.06,61.09 U$106.1
  Bottom 0.254: v85.22,68.58 88.65,68.58 90.42,66.8 90.42,62.23 v91.57,61.09
DO14  (via drill 0.51)
  Top 0.254: U$116.1 106.43,66.55 106.5,66.47 U15.1 108.09,68.57 v108.08,68.58 | v114.43,61.09 116.92,61.09 U$114.1
  Bottom 0.254: v108.08,68.58 111.51,68.58 113.28,66.8 113.28,62.23 v114.43,61.09
DO15  (via drill 0.51)
  Top 0.254: U$124.1 14.99,89.41 15.06,89.33 U16.1 16.65,91.43 v16.64,91.44 | v22.99,83.95 25.48,83.95 U$122.1
  Bottom 0.254: v16.64,91.44 20.07,91.44 21.84,89.66 21.84,85.09 v22.99,83.95
DO16  (via drill 0.51)
  Top 0.254: U$132.1 37.85,89.41 37.92,89.33 U17.1 39.51,91.43 v39.5,91.44 | v45.85,83.95 48.34,83.95 U$130.1
  Bottom 0.254: v39.5,91.44 42.93,91.44 44.7,89.66 44.7,85.09 v45.85,83.95
DO17  (via drill 0.51)
  Top 0.254: U$140.1 60.71,89.41 60.78,89.33 U18.1 62.37,91.43 v62.36,91.44 | v68.71,83.95 71.2,83.95 U$138.1
  Bottom 0.254: v62.36,91.44 65.79,91.44 67.56,89.66 67.56,85.09 v68.71,83.95
DO18  (via drill 0.51)
  Top 0.254: U$148.1 83.57,89.41 83.64,89.33 U19.1 85.23,91.43 v85.22,91.44 | v91.57,83.95 94.06,83.95 U$146.1
  Bottom 0.254: v85.22,91.44 88.65,91.44 90.42,89.66 90.42,85.09 v91.57,83.95
DO19  (via drill 0.51)
  Top 0.254: U$156.1 106.43,89.41 106.5,89.33 U20.1 108.09,91.43 v108.08,91.44 | v114.43,83.95 116.92,83.95 U$154.1
  Bottom 0.254: v108.08,91.44 111.51,91.44 113.28,89.66 113.28,85.09 v114.43,83.95
DO20  (via drill 0.51)
  Top 0.254: U$164.1 14.99,112.27 15.06,112.19 U21.1 16.65,114.29 v16.64,114.3 | v22.99,106.81 25.48,106.81 U$162.1
  Bottom 0.254: v16.64,114.3 20.07,114.3 21.84,112.52 21.84,107.95 v22.99,106.81
DO21  (via drill 0.51)
  Top 0.254: U$172.1 37.85,112.27 37.92,112.19 U22.1 39.51,114.29 v39.5,114.3 | v45.85,106.81 48.34,106.81 U$170.1
  Bottom 0.254: v39.5,114.3 42.93,114.3 44.7,112.52 44.7,107.95 v45.85,106.81
DO22  (via drill 0.51)
  Top 0.254: U$180.1 60.71,112.27 60.78,112.19 U23.1 62.37,114.29 v62.36,114.3 | v68.71,106.81 71.2,106.81 U$178.1
  Bottom 0.254: v62.36,114.3 65.79,114.3 67.56,112.52 67.56,107.95 v68.71,106.81
DO23  (via drill 0.51)
  Top 0.254: U$188.1 83.57,112.27 83.64,112.19 U24.1 85.23,114.29 v85.22,114.3 | v91.57,106.81 94.06,106.81 U$186.1
  Bottom 0.254: v85.22,114.3 88.65,114.3 90.42,112.52 90.42,107.95 v91.57,106.81
DO24  (via drill 0.51)
  Top 0.254: U$196.1 106.43,112.27 106.5,112.19 U25.1 108.09,114.29 v108.08,114.3 | v114.43,106.81 116.92,106.81 U$194.1
  Bottom 0.254: v108.08,114.3 111.51,114.3 113.28,112.52 113.28,107.95 v114.43,106.81
GND  (via drill 0.51)
  other vias: 19.56,20.7
  pour Bottom (isolate 0.305): 10.16,27.94 10.16,10.16 27.94,10.16 27.94,27.94
  pour Top (isolate 0.305): 10.16,27.94 10.16,10.16 27.94,10.16 27.94,27.94
GND1  (via drill 0.51)
  other vias: 42.42,20.7
  pour Bottom (isolate 0.305): 33.02,27.94 33.02,10.16 50.8,10.16 50.8,27.94
  pour Top (isolate 0.305): 33.02,27.94 33.02,10.16 50.8,10.16 50.8,27.94
GND2  (via drill 0.51)
  other vias: 65.28,20.7
  pour Bottom (isolate 0.305): 55.88,27.94 55.88,10.16 73.66,10.16 73.66,27.94
  pour Top (isolate 0.305): 55.88,27.94 55.88,10.16 73.66,10.16 73.66,27.94
GND3  (via drill 0.51)
  other vias: 88.14,20.7
  pour Bottom (isolate 0.305): 78.74,27.94 78.74,10.16 96.52,10.16 96.52,27.94
  pour Top (isolate 0.305): 78.74,27.94 78.74,10.16 96.52,10.16 96.52,27.94
GND4  (via drill 0.51)
  other vias: 111,20.7
  pour Bottom (isolate 0.305): 101.6,27.94 101.6,10.16 119.38,10.16 119.38,27.94
  pour Top (isolate 0.305): 101.6,27.94 101.6,10.16 119.38,10.16 119.38,27.94
GND5  (via drill 0.51)
  other vias: 19.56,43.56
  pour Bottom (isolate 0.305): 10.16,50.8 10.16,33.02 27.94,33.02 27.94,50.8
  pour Top (isolate 0.305): 10.16,50.8 10.16,33.02 27.94,33.02 27.94,50.8
GND6  (via drill 0.51)
  other vias: 42.42,43.56
  pour Bottom (isolate 0.305): 33.02,50.8 33.02,33.02 50.8,33.02 50.8,50.8
  pour Top (isolate 0.305): 33.02,50.8 33.02,33.02 50.8,33.02 50.8,50.8
GND7  (via drill 0.51)
  other vias: 65.28,43.56
  pour Bottom (isolate 0.305): 55.88,50.8 55.88,33.02 73.66,33.02 73.66,50.8
  pour Top (isolate 0.305): 55.88,50.8 55.88,33.02 73.66,33.02 73.66,50.8
GND8  (via drill 0.51)
  other vias: 88.14,43.56
  pour Bottom (isolate 0.305): 78.74,50.8 78.74,33.02 96.52,33.02 96.52,50.8
  pour Top (isolate 0.305): 78.74,50.8 78.74,33.02 96.52,33.02 96.52,50.8
GND9  (via drill 0.51)
  other vias: 111,43.56
  pour Bottom (isolate 0.305): 101.6,50.8 101.6,33.02 119.38,33.02 119.38,50.8
  pour Top (isolate 0.305): 101.6,50.8 101.6,33.02 119.38,33.02 119.38,50.8
GND10  (via drill 0.51)
  other vias: 19.56,66.42
  pour Bottom (isolate 0.305): 10.16,73.66 10.16,55.88 27.94,55.88 27.94,73.66
  pour Top (isolate 0.305): 10.16,73.66 10.16,55.88 27.94,55.88 27.94,73.66
GND11  (via drill 0.51)
  other vias: 42.42,66.42
  pour Bottom (isolate 0.305): 33.02,73.66 33.02,55.88 50.8,55.88 50.8,73.66
  pour Top (isolate 0.305): 33.02,73.66 33.02,55.88 50.8,55.88 50.8,73.66
GND12  (via drill 0.51)
  other vias: 65.28,66.42
  pour Bottom (isolate 0.305): 55.88,73.66 55.88,55.88 73.66,55.88 73.66,73.66
  pour Top (isolate 0.305): 55.88,73.66 55.88,55.88 73.66,55.88 73.66,73.66
GND13  (via drill 0.51)
  other vias: 88.14,66.42
  pour Bottom (isolate 0.305): 78.74,73.66 78.74,55.88 96.52,55.88 96.52,73.66
  pour Top (isolate 0.305): 78.74,73.66 78.74,55.88 96.52,55.88 96.52,73.66
GND14  (via drill 0.51)
  other vias: 111,66.42
  pour Bottom (isolate 0.305): 101.6,73.66 101.6,55.88 119.38,55.88 119.38,73.66
  pour Top (isolate 0.305): 101.6,73.66 101.6,55.88 119.38,55.88 119.38,73.66
GND15  (via drill 0.51)
  other vias: 19.56,89.28
  pour Bottom (isolate 0.305): 10.16,96.52 10.16,78.74 27.94,78.74 27.94,96.52
  pour Top (isolate 0.305): 10.16,96.52 10.16,78.74 27.94,78.74 27.94,96.52
GND16  (via drill 0.51)
  other vias: 42.42,89.28
  pour Bottom (isolate 0.305): 33.02,96.52 33.02,78.74 50.8,78.74 50.8,96.52
  pour Top (isolate 0.305): 33.02,96.52 33.02,78.74 50.8,78.74 50.8,96.52
GND17  (via drill 0.51)
  other vias: 65.28,89.28
  pour Bottom (isolate 0.305): 55.88,96.52 55.88,78.74 73.66,78.74 73.66,96.52
  pour Top (isolate 0.305): 55.88,96.52 55.88,78.74 73.66,78.74 73.66,96.52
GND18  (via drill 0.51)
  other vias: 88.14,89.28
  pour Bottom (isolate 0.305): 78.74,96.52 78.74,78.74 96.52,78.74 96.52,96.52
  pour Top (isolate 0.305): 78.74,96.52 78.74,78.74 96.52,78.74 96.52,96.52
GND19  (via drill 0.51)
  other vias: 111,89.28
  pour Bottom (isolate 0.305): 101.6,96.52 101.6,78.74 119.38,78.74 119.38,96.52
  pour Top (isolate 0.305): 101.6,96.52 101.6,78.74 119.38,78.74 119.38,96.52
GND20  (via drill 0.51)
  other vias: 19.56,112.14
  pour Bottom (isolate 0.305): 10.16,119.38 10.16,101.6 27.94,101.6 27.94,119.38
  pour Top (isolate 0.305): 10.16,119.38 10.16,101.6 27.94,101.6 27.94,119.38
GND21  (via drill 0.51)
  other vias: 42.42,112.14
  pour Bottom (isolate 0.305): 33.02,119.38 33.02,101.6 50.8,101.6 50.8,119.38
  pour Top (isolate 0.305): 33.02,119.38 33.02,101.6 50.8,101.6 50.8,119.38
GND22  (via drill 0.51)
  other vias: 65.28,112.14
  pour Bottom (isolate 0.305): 55.88,119.38 55.88,101.6 73.66,101.6 73.66,119.38
  pour Top (isolate 0.305): 55.88,119.38 55.88,101.6 73.66,101.6 73.66,119.38
GND23  (via drill 0.51)
  other vias: 88.14,112.14
  pour Bottom (isolate 0.305): 78.74,119.38 78.74,101.6 96.52,101.6 96.52,119.38
  pour Top (isolate 0.305): 78.74,119.38 78.74,101.6 96.52,101.6 96.52,119.38
GND24  (via drill 0.51)
  other vias: 111,112.14
  pour Bottom (isolate 0.305): 101.6,119.38 101.6,101.6 119.38,101.6 119.38,119.38
  pour Top (isolate 0.305): 101.6,119.38 101.6,101.6 119.38,101.6 119.38,119.38
VCC
  Top 0.254: U$6.1 19.05,24.64 18.2,23.79 C1.1 18.2,20.79 18.4,20.59 18.4,19.05 | 18.4,19.05 18.4,17.77 17.98,17.35 U1.3 | U1.5 18.4,19.05
VCC1
  Top 0.254: U$13.1 41.91,24.64 41.06,23.79 C2.1 41.06,20.79 41.26,20.59 41.26,19.05 | 41.26,19.05 41.26,17.77 40.84,17.35 U2.3 | U2.5 41.26,19.05
VCC2
  Top 0.254: U$21.1 64.77,24.64 63.92,23.79 C3.1 63.92,20.79 64.12,20.59 64.12,19.05 | 64.12,19.05 64.12,17.77 63.7,17.35 U3.3 | U3.5 64.12,19.05
VCC3
  Top 0.254: U$29.1 87.63,24.64 86.78,23.79 C4.1 86.78,20.79 86.98,20.59 86.98,19.05 | 86.98,19.05 86.98,17.77 86.56,17.35 U4.3 | U4.5 86.98,19.05
VCC4
  Top 0.254: U$37.1 110.49,24.64 109.64,23.79 C5.1 109.64,20.79 109.84,20.59 109.84,19.05 | 109.84,19.05 109.84,17.77 109.42,17.35 U5.3 | U5.5 109.84,19.05
VCC5
  Top 0.254: U$45.1 19.05,47.5 18.2,46.65 C6.1 18.2,43.65 18.4,43.45 18.4,41.91 | 18.4,41.91 18.4,40.62 17.98,40.21 U6.3 | U6.5 18.4,41.91
VCC6
  Top 0.254: U$53.1 41.91,47.5 41.06,46.65 C7.1 41.06,43.65 41.26,43.45 41.26,41.91 | 41.26,41.91 41.26,40.62 40.84,40.21 U7.3 | U7.5 41.26,41.91
VCC7
  Top 0.254: U$61.1 64.77,47.5 63.92,46.65 C8.1 63.92,43.65 64.12,43.45 64.12,41.91 | 64.12,41.91 64.12,40.62 63.7,40.21 U8.3 | U8.5 64.12,41.91
VCC8
  Top 0.254: U$69.1 87.63,47.5 86.78,46.65 C9.1 86.78,43.65 86.98,43.45 86.98,41.91 | 86.98,41.91 86.98,40.62 86.56,40.21 U9.3 | U9.5 86.98,41.91
VCC9
  Top 0.254: U$77.1 110.49,47.5 109.64,46.65 C10.1 109.64,43.65 109.84,43.45 109.84,41.91 | 109.84,41.91 109.84,40.62 109.42,40.21 U10.3 | U10.5 109.84,41.91
VCC10
  Top 0.254: U$85.1 19.05,70.36 18.2,69.51 C11.1 18.2,66.51 18.4,66.31 18.4,64.77 | 18.4,64.77 18.4,63.48 17.98,63.07 U11.3 | U11.5 18.4,64.77
VCC11
  Top 0.254: U$93.1 41.91,70.36 41.06,69.51 C12.1 41.06,66.51 41.26,66.31 41.26,64.77 | 41.26,64.77 41.26,63.48 40.84,63.07 U12.3 | U12.5 41.26,64.77
VCC12
  Top 0.254: U$101.1 64.77,70.36 63.92,69.51 C13.1 63.92,66.51 64.12,66.31 64.12,64.77 | 64.12,64.77 64.12,63.48 63.7,63.07 U13.3 | U13.5 64.12,64.77
VCC13
  Top 0.254: U$109.1 87.63,70.36 86.78,69.51 C14.1 86.78,66.51 86.98,66.31 86.98,64.77 | 86.98,64.77 86.98,63.48 86.56,63.07 U14.3 | U14.5 86.98,64.77
VCC14
  Top 0.254: U$117.1 110.49,70.36 109.64,69.51 C15.1 109.64,66.51 109.84,66.31 109.84,64.77 | 109.84,64.77 109.84,63.48 109.42,63.07 U15.3 | U15.5 109.84,64.77
VCC15
  Top 0.254: U$125.1 19.05,93.22 18.2,92.37 C16.1 18.2,89.37 18.4,89.17 18.4,87.63 | 18.4,87.63 18.4,86.34 17.98,85.93 U16.3 | U16.5 18.4,87.63
VCC16
  Top 0.254: U$133.1 41.91,93.22 41.06,92.37 C17.1 41.06,89.37 41.26,89.17 41.26,87.63 | 41.26,87.63 41.26,86.34 40.84,85.93 U17.3 | U17.5 41.26,87.63
VCC17
  Top 0.254: U$141.1 64.77,93.22 63.92,92.37 C18.1 63.92,89.37 64.12,89.17 64.12,87.63 | 64.12,87.63 64.12,86.34 63.7,85.93 U18.3 | U18.5 64.12,87.63
VCC18
  Top 0.254: U$149.1 87.63,93.22 86.78,92.37 C19.1 86.78,89.37 86.98,89.17 86.98,87.63 | 86.98,87.63 86.98,86.34 86.56,85.93 U19.3 | U19.5 86.98,87.63
VCC19
  Top 0.254: U$157.1 110.49,93.22 109.64,92.37 C20.1 109.64,89.37 109.84,89.17 109.84,87.63 | 109.84,87.63 109.84,86.34 109.42,85.93 U20.3 | U20.5 109.84,87.63
VCC20
  Top 0.254: U$165.1 19.05,116.08 18.2,115.23 C21.1 18.2,112.23 18.4,112.03 18.4,110.49 | 18.4,110.49 18.4,109.2 17.98,108.79 U21.3 | U21.5 18.4,110.49
VCC21
  Top 0.254: U$173.1 41.91,116.08 41.06,115.23 C22.1 41.06,112.23 41.26,112.03 41.26,110.49 | 41.26,110.49 41.26,109.2 40.84,108.79 U22.3 | U22.5 41.26,110.49
VCC22
  Top 0.254: U$181.1 64.77,116.08 63.92,115.23 C23.1 63.92,112.23 64.12,112.03 64.12,110.49 | 64.12,110.49 64.12,109.2 63.7,108.79 U23.3 | U23.5 64.12,110.49
VCC23
  Top 0.254: U$189.1 87.63,116.08 86.78,115.23 C24.1 86.78,112.23 86.98,112.03 86.98,110.49 | 86.98,110.49 86.98,109.2 86.56,108.79 U24.3 | U24.5 86.98,110.49
VCC24
  Top 0.254: U$197.1 110.49,116.08 109.64,115.23 C25.1 109.64,112.23 109.84,112.03 109.84,110.49 | 109.84,110.49 109.84,109.2 109.42,108.79 U25.3 | U25.5 109.84,110.49

## Text on the board
Bottom: v10 | v10 | v10 | v10 | v10 | v10 | v10 | v10 | v10 | v10 | v10 | v10 | v10 | v10 | v10 | v10 | v10 | v10 | v10 | v10 | v10 | v10 | v10 | v10 | v10
tPlace: + | + | + | + | + | DO | DI | DO | DI | DO | DI | DO | DI | DO | DI | DI | DO | DI | DO | DI | DO | DI | DO | DI | DO | - | - | - | - | - | + | + | + | + | + | DO | DI | DO | DI | DO | DI | DO | DI | DO | DI | DI | DO | DI | DO | DI | DO | DI | DO | DI | DO | - | - | - | - | - | + | + | + | + | + | DO | DI | DO | DI | DO | DI | DO | DI | DO | DI | DI | DO | DI | DO | DI | DO | DI | DO | DI | DO | - | - | - | - | - | + | + | + | + | + | DO | DI | DO | DI | DO | DI | DO | DI | DO | DI | DI | DO | DI | DO | DI | DO | DI | DO | DI | DO | - | - | - | - | - | + | + | + | + | + | DO | DI | DO | DI | DO | DI | DO | DI | DO | DI | DI | DO | DI | DO | DI | DO | DI | DO | DI | DO | - | - | - | - | -